# EAGLE board barbi_pozoriste_master_revb (EAGLE 5.00), part 1 of 2
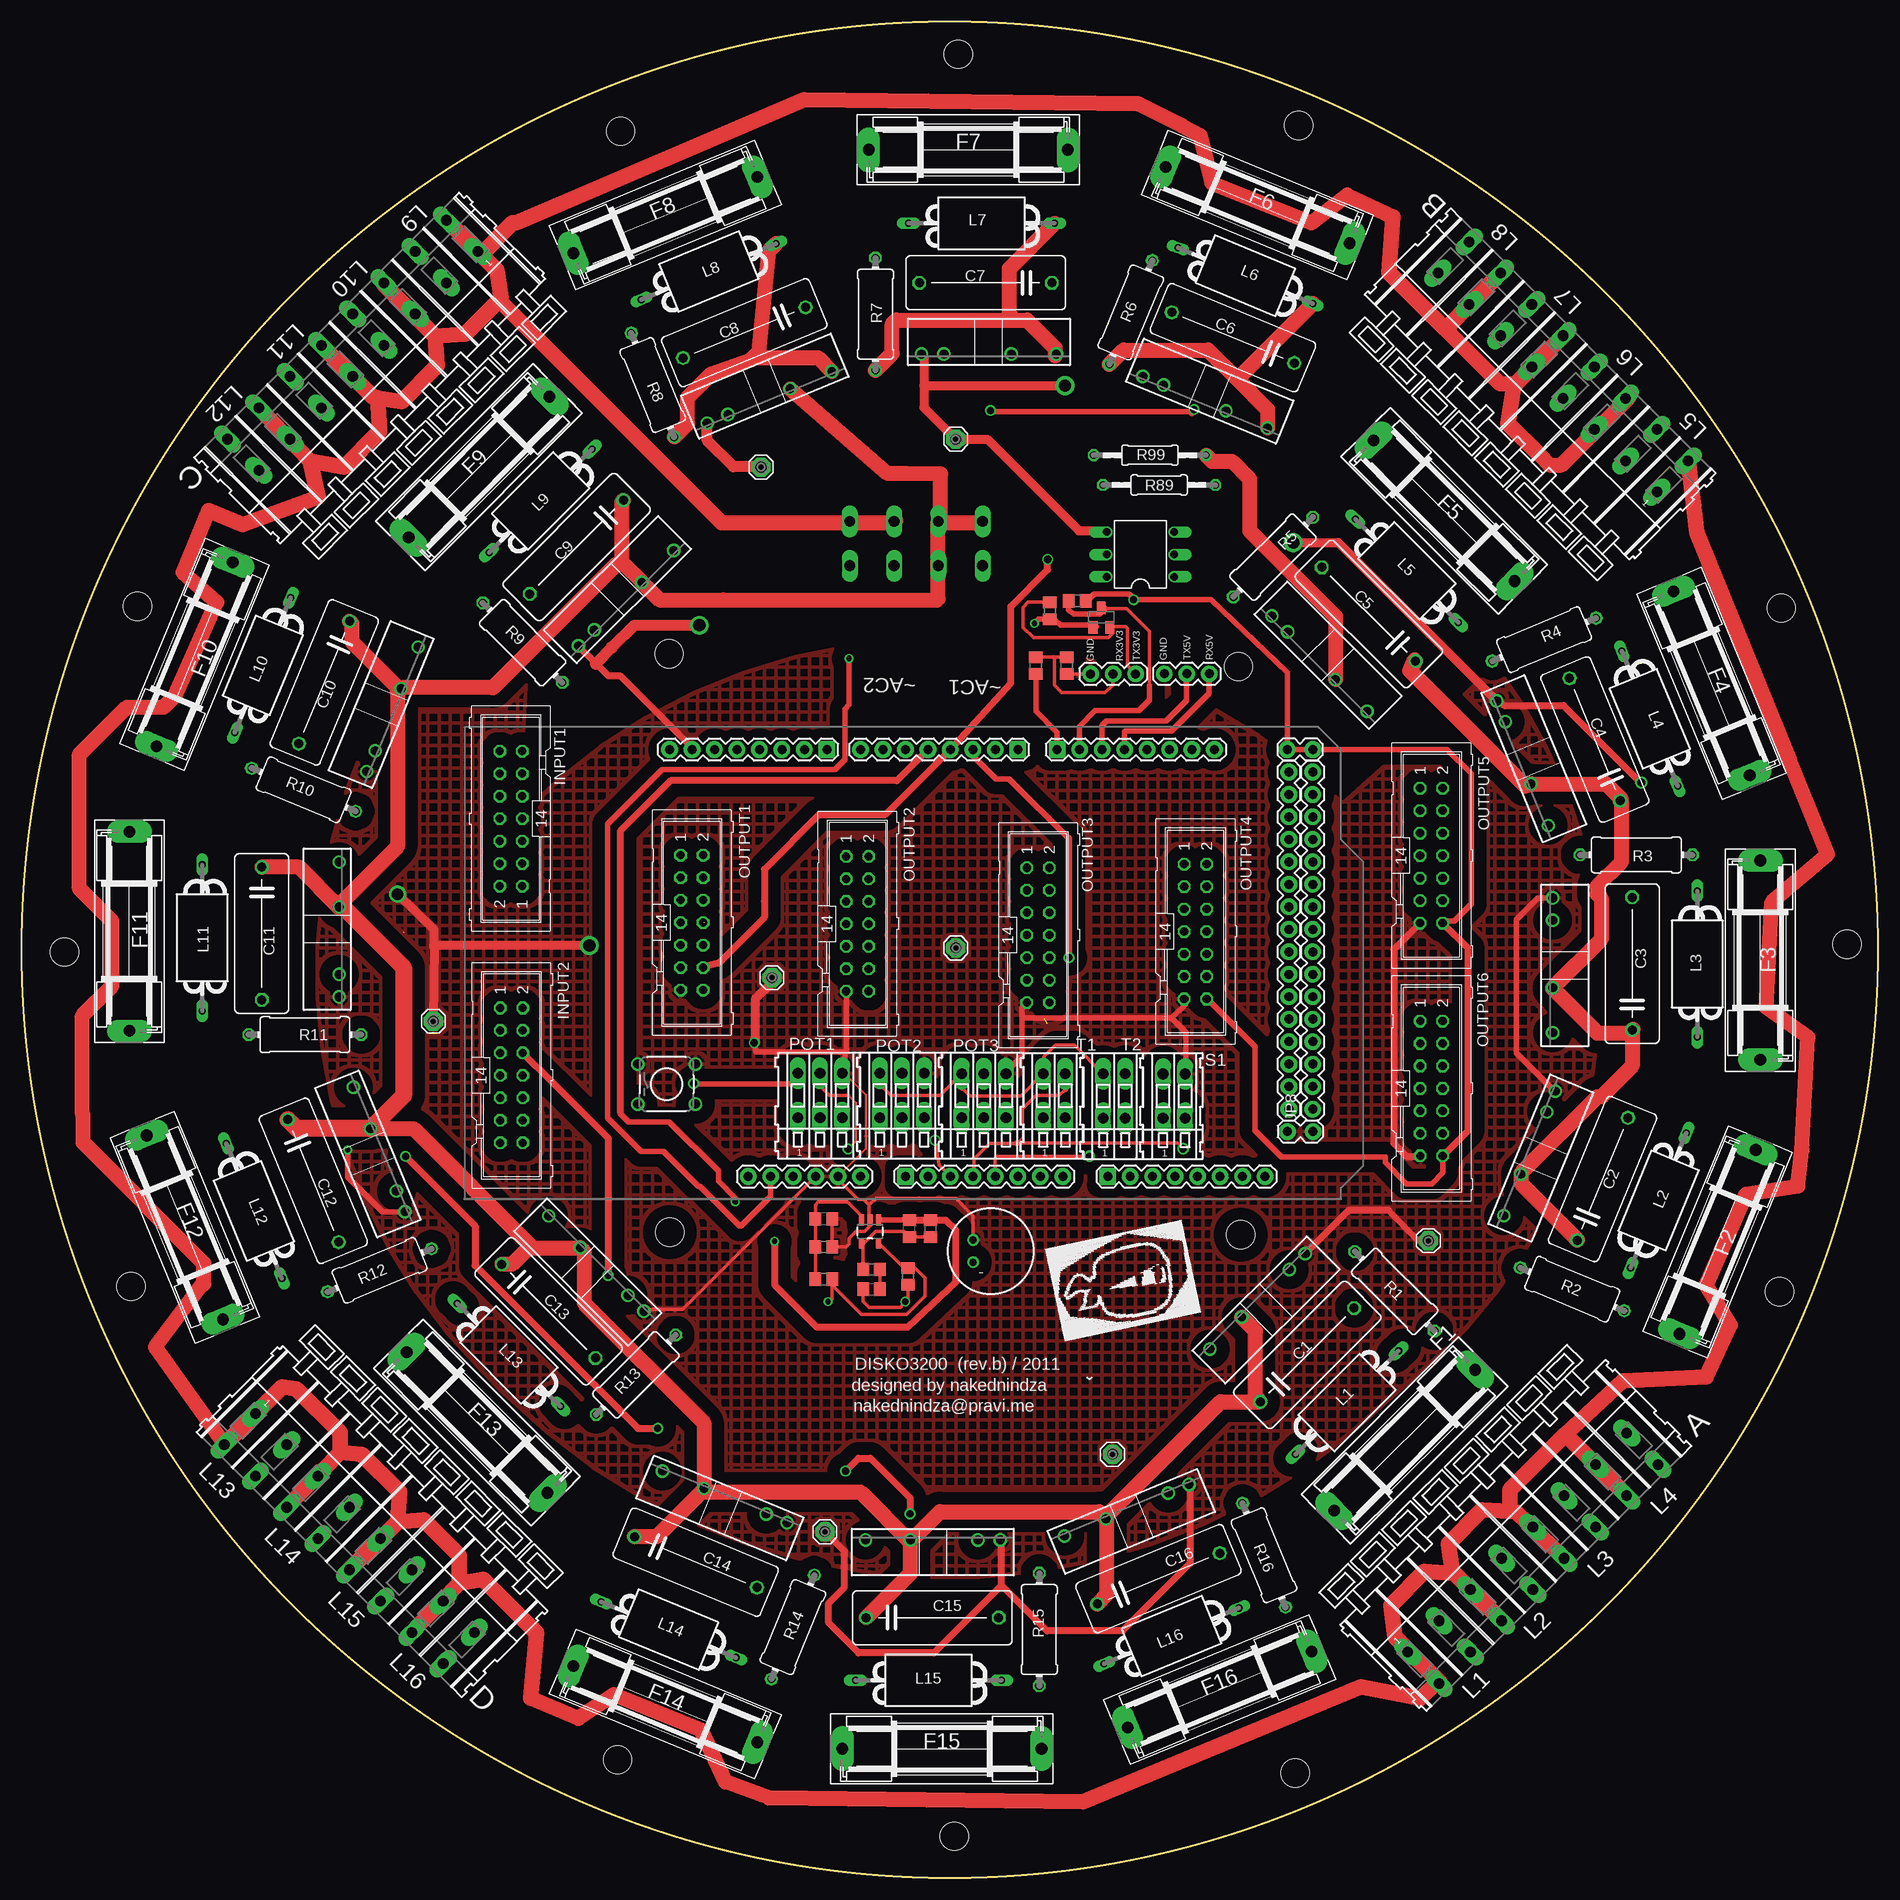
[diagram p0: board, top side]
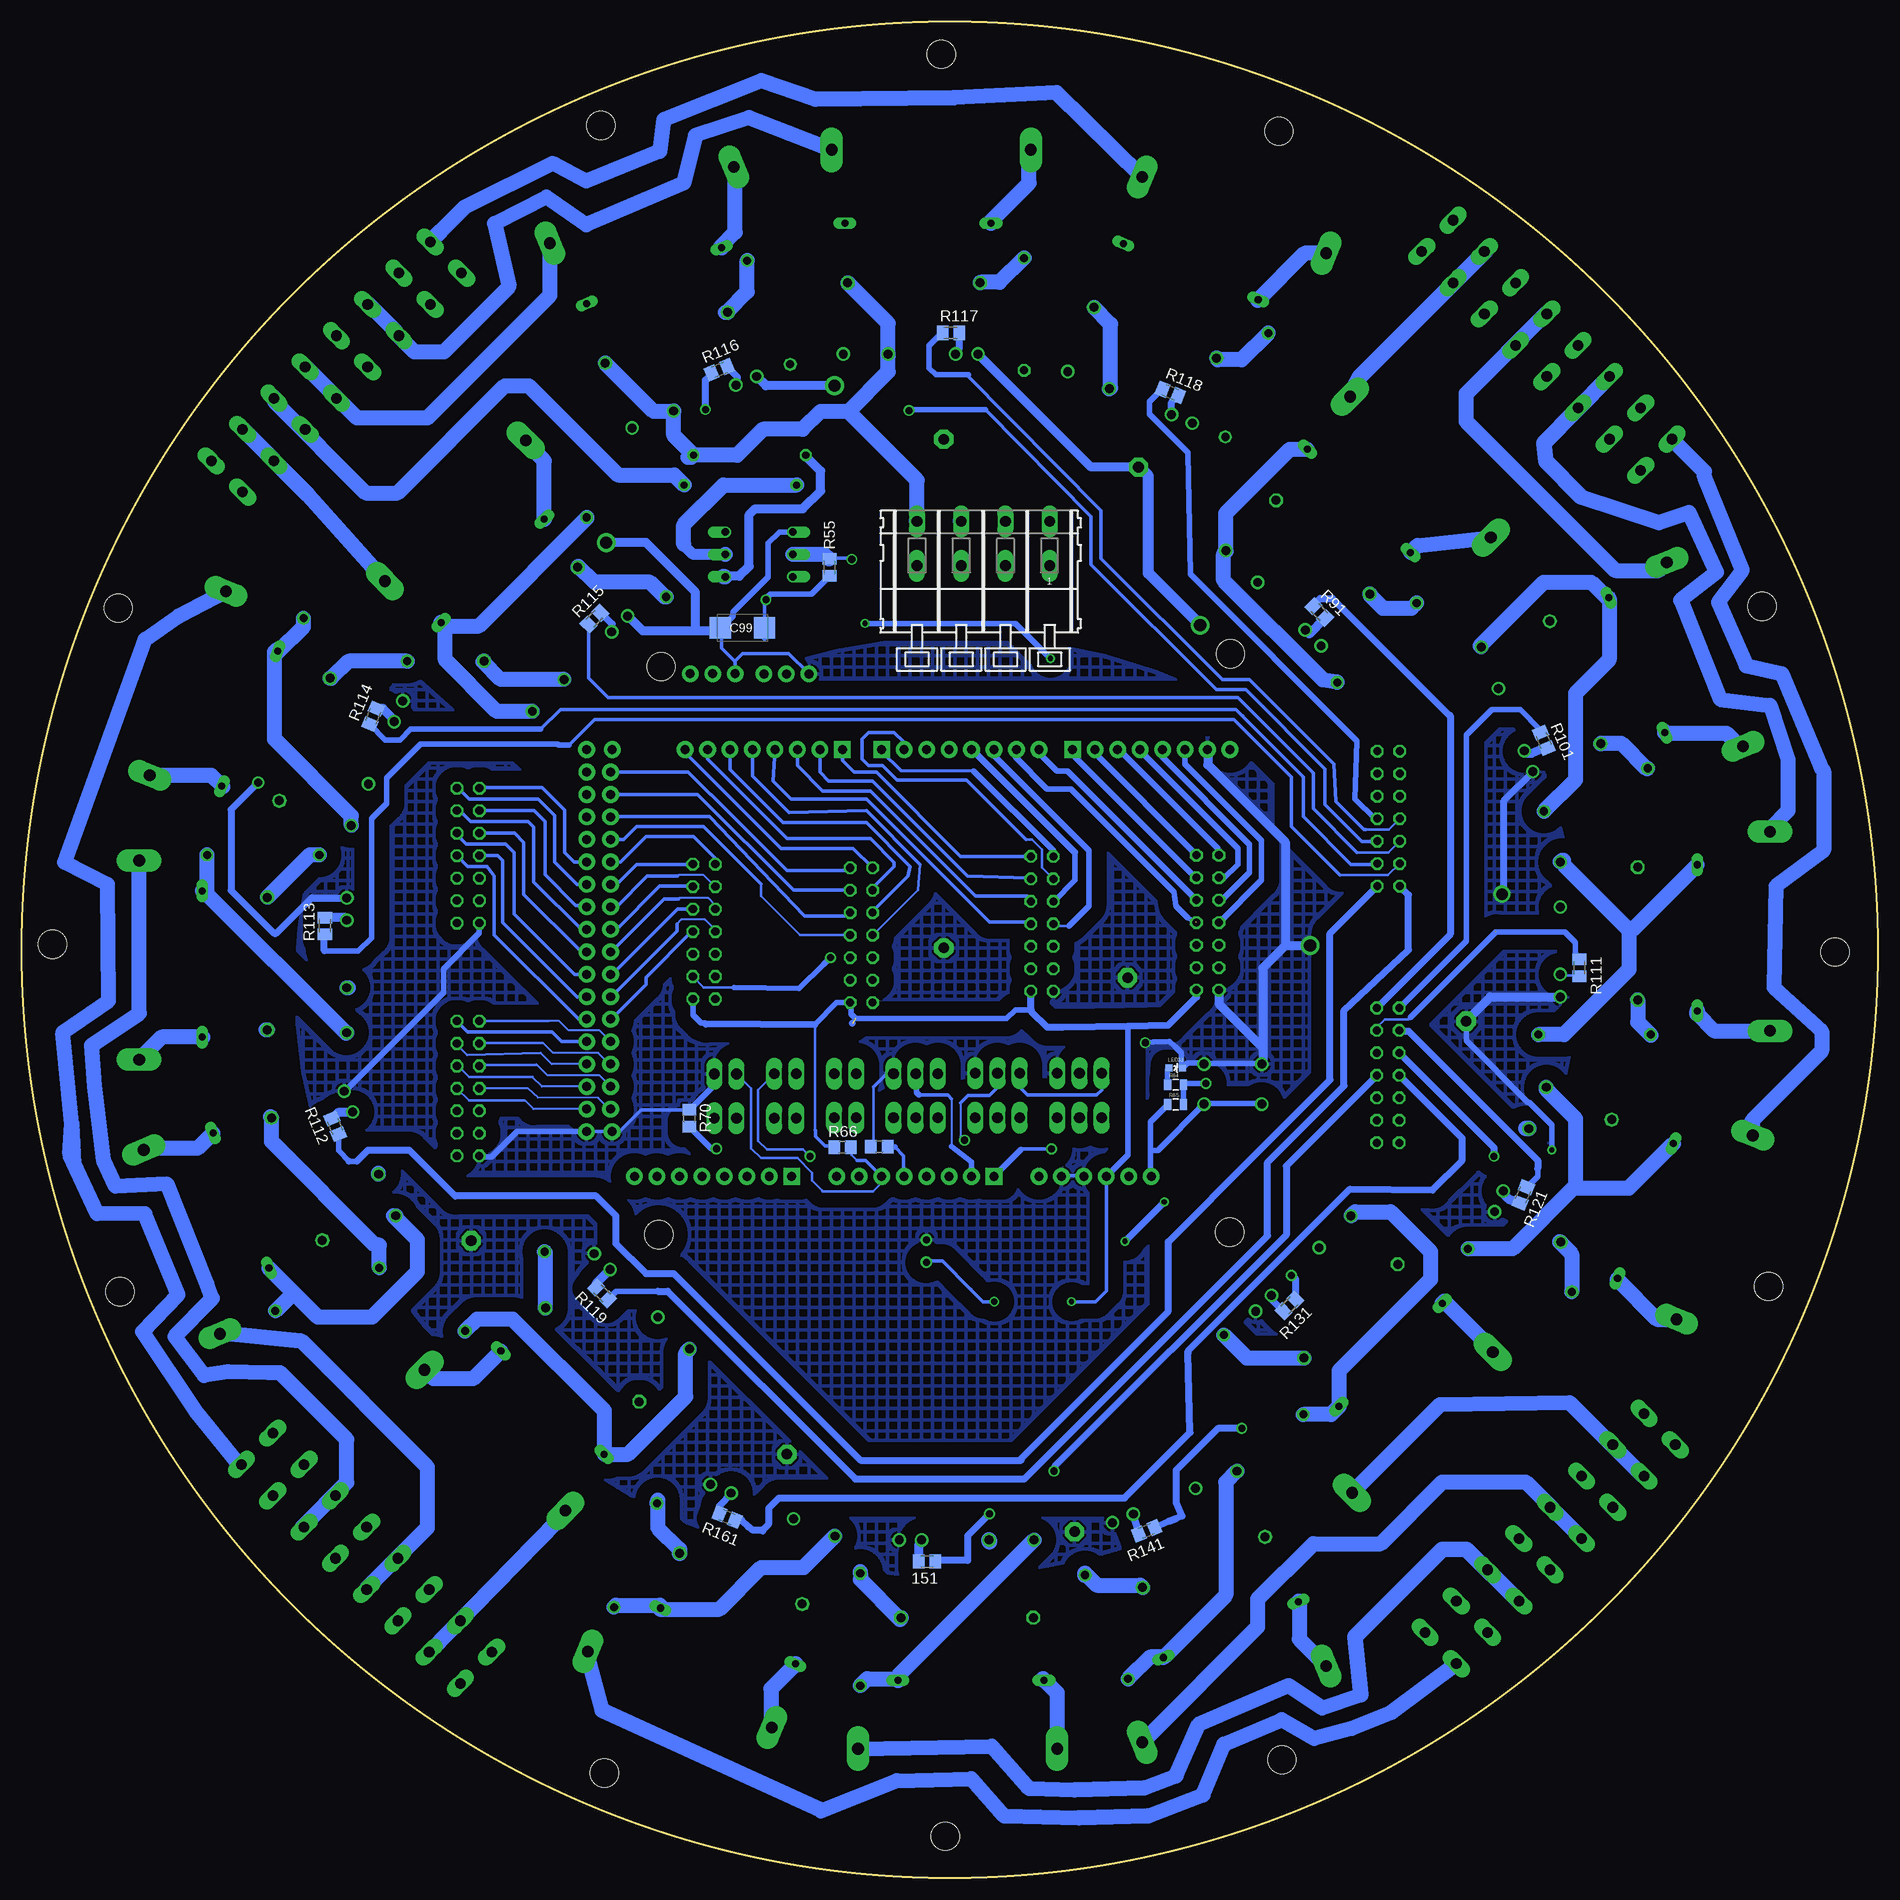
[diagram p1: board, bottom side, seen from below]

No outline drawn. Coordinates in mm, seen from the top.
Copper layers (1*16): Top 0.035mm / dielectric 1.5mm / Bottom 0.035mm
Design rules "default *": minimum track width 10mil, minimum drill 24mil, track to track 0.15mm, track to pad 0.15mm, pad to pad 0.15mm, via to via 0.15mm, smd to smd 0.15mm, copper to edge 40mil, drill to drill 8mil, minimum pad ring 10mil, minimum via ring 8mil, stop-mask expansion 4mil, vias tented up to drill 0mil, thermal gap 10mil
Holes 3.2 mm at -32.4,33.23 32.21,-32.42 -32.33,-32.15 31.94,31.79 -37.88,92.31 38.37,-93.28 -93.23,-38.28 -38.24,-91.8 38.76,92.95 93.31,38.39 -92.5,38.6 93.12,-38.88 0.27,101 -100.74,-0.47 -0.17,-100.44 100.73,0.41
Milling: area -105.5,-105.1 to 104.2,104.6

## Footprints (pad centres in the part's own frame; a part is rotated, then mirrored left to right if it is on the bottom)
M0805 = smd 1.3 x 1.6: 1 -0.95,0; 2 0.95,0
C150-064X183 = drill 1.016 octagon: 1 -7.493,0; 2 7.493,0
C0805 = smd 1.3 x 1.5: 1 -0.95,0; 2 0.95,0
SMC_C = smd 2.4 x 2.4: + -2.5,0; - 2.5,0
SH22,5 = drill 1.321 pad 2.54 long: 1 -11.252,0; 2 11.252,0
1X03 = drill 1.016 pad 1.88 round: 1 0,0; 2 2.54,0; 3 5.08,0
1X08 = drill 1.016 pad 1.88 square: 1 0,0 | drill 1.016 pad 1.88 round: 2 2.54,0; 3 5.08,0; 4 7.62,0; 5 10.16,0; 6 12.7,0; 7 15.24,0; 8 17.78,0
1X16 = drill 1.016 pad 1.88 round: 1 0,0; 2 2.54,0; 3 5.08,0; 4 7.62,0; 5 10.16,0; 6 12.7,0; 7 15.24,0; 8 17.78,0; 9 20.32,0; 10 22.86,0; 11 25.4,0; 12 27.94,0; 13 30.48,0; 14 33.02,0; 15 35.56,0; 16 38.1,0
1X06 = drill 1.016 pad 1.88 round: 1 0,0; 2 2.54,0; 3 5.08,0; 4 7.62,0; 5 10.16,0; 6 12.7,0
1X02_LOCK = drill 1.016 pad 1.88 round: 1 -0.178,0; 2 2.718,0
S102S01 = drill 1 round: 1 -7.62,0; 2 -2.54,0; 3 5.08,0; 4 7.62,0
ZD6-2W5 = drill 0.8 long: 1 -8.255,0; 2 8.255,0
LED-0603 = smd 0.8 x 0.8: A 0,-0.75; C 0,0.75
MCS08 = drill 1.194 pad 2.159 octagon: MP 0,0
DIL06 = drill 0.813 offset: 1 -2.54,-3.81; 2 0,-3.81; 3 2.54,-3.81; 4 2.54,3.81; 5 0,3.81; 6 -2.54,3.81
SOT23 = smd 1 x 1.4: 1 -0.95,-1.1; 2 0.95,-1.1; 3 0,1.1
0411/12 = drill 0.914 octagon: 1 -6.35,0; 2 6.35,0
R0805 = smd 1.3 x 1.5: 1 -0.95,0; 2 0.95,0
0805 = smd 0.8 x 1.2: 1 -0.9,0; 2 0.9,0
0207/12 = drill 0.813 octagon: 1 -6.35,0; 2 6.35,0
TACTILE-PTH = drill 1.016 round: 1 -3.251,2.261; 2 3.251,2.261; 3 -3.251,-2.261; 4 3.251,-2.261
ML14 = drill 0.914 octagon: 1 -7.62,-1.27; 2 -7.62,1.27; 3 -5.08,-1.27; 4 -5.08,1.27; 5 -2.54,-1.27; 6 -2.54,1.27; 7 0,-1.27; 8 0,1.27; 9 2.54,-1.27; 10 2.54,1.27; 11 5.08,-1.27; 12 5.08,1.27; 13 7.62,-1.27; 14 7.62,1.27
MIC-9.7MM = drill 0.8 round: 1 -2,1.27; 2 -2,-1.27
SOT23-5 = smd 0.55 x 1.2: 1 -0.95,-1.3; 2 0,-1.3; 3 0.95,-1.3; 4 0.95,1.3; 5 -0.95,1.3
255-404-5 = drill 1.2 long: A1 -7.5,0; A2 -2.5,0; A3 2.5,0; A4 7.5,0; B1 -7.5,-5; B2 -2.5,-5; B3 2.5,-5; B4 7.5,-5
255-408-5 = drill 1.2 long: A1 -17.5,0; A2 -12.5,0; A3 -7.5,0; A4 -2.5,0; A5 2.5,0; A6 7.5,0; A7 12.5,0; A8 17.5,0; B1 -17.5,-5; B2 -12.5,-5; B3 -7.5,-5; B4 -2.5,-5; B5 2.5,-5; B6 7.5,-5; B7 12.5,-5; B8 17.5,-5
233-103 = drill 1.2 long: A1 -2.5,2.5; A2 0,2.5; A3 2.5,2.5; B1 -2.5,-2.5; B2 0,-2.5; B3 2.5,-2.5
233-102 = drill 1.2 long: A1 -1.25,2.5; A2 1.25,2.5; B1 -1.25,-2.5; B2 1.25,-2.5

## Placement (x,y rotation side)
151  330R  [M0805]  1.88,-69.37 180 bottom
C1  68nF  [C150-064X183]  39.73,-46.02 45 top
C2  68nF  [C150-064X183]  73.11,-26.14 67.5 top
C3  68nF  [C150-064X183]  76.46,-1.79 90 top
C4  68nF  [C150-064X183]  72.24,23.54 112.5 top
C5  68nF  [C150-064X183]  46.68,37.73 135 top
C6  68nF  [C150-064X183]  31.33,68.96 157.5 top
C7  68nF  [C150-064X183]  3.38,75.17 180 top
C8  68nF  [C150-064X183]  -23.91,69.53 202.5 top
C9  68nF  [C150-064X183]  -42.85,45.3 225 top
C10  68nF  [C150-064X183]  -71.38,30 247.5 top
C11  68nF  [C150-064X183]  -78.45,1.61 270 top
C12  68nF  [C150-064X183]  -72.62,-26.34 292.5 top
C13  68nF  [C150-064X183]  -46.03,-41.08 315 top
C14  68nF  [C150-064X183]  -29.4,-69.45 337.5 top
C15  68nF  [C150-064X183]  -2.64,-75.73 0 top
C16  68nF  [C150-064X183]  22.92,-71.3 22.5 top
C17  4.7uF  [C0805]  -9.52,-38.58 0 top
C18  12pF  [C0805]  -5.24,-31.75 90 top
C19  1uF  [C0805]  -14.92,-30.64 180 top
C99  47uF  [SMC_C]  22.74,36.17 180 bottom
F1  3A  [SH22,5]  50.73,-55.68 225 top
F2  3A  [SH22,5]  86.12,-33.24 247.5 top
F3  3A  [SH22,5]  90.94,-1.38 90 top
F4  3A  [SH22,5]  85.45,29.88 112.5 top
F5  3A  [SH22,5]  55.21,49.4 315 top
F6  3A  [SH22,5]  34.11,83.96 337.5 top
F7  3A  [SH22,5]  1.42,90.2 0 top
F8  3A  [SH22,5]  -32.84,82.81 22.5 top
F9  3A  [SH22,5]  -53.89,54.33 45 top
F10  3A  [SH22,5]  -86.03,33.17 67.5 top
F11  3A  [SH22,5]  -93.42,1.87 90 top
F12  3A  [SH22,5]  -87.15,-31.6 112.5 top
F13  3A  [SH22,5]  -54.11,-53.65 315 top
F14  3A  [SH22,5]  -32.83,-85.5 337.5 top
F15  3A  [SH22,5]  -1.57,-90.53 0 top
F16  3A  [SH22,5]  29.84,-83.84 22.5 top
JP1  [1X03]  23.57,30.97 0 top
JP2  [1X03]  15.24,30.96 0 top
JP3  [1X08]  -14.57,22.41 180 top
JP4  [1X08]  7.02,22.41 180 top
JP5  [1X08]  11.46,22.41 0 top
JP6  [1X08]  17.18,-25.85 0 top
JP7  [1X08]  -5.68,-25.85 0 top
JP8  M16PTH  [1X16]  40.36,-18.23 90 top
JP9  M16PTH  [1X16]  37.66,-18.23 90 top
JP10  [1X06]  -23.46,-25.85 0 top
JP11  [1X02_LOCK]  37.67,-20.77 0 top
JP12  [1X02_LOCK]  37.65,22.41 0 top
K1  S202S01  [S102S01]  34.12,-39.96 45 top
K2  S202S01  [S102S01]  64.87,-23.25 67.5 top
K3  S202S01  [S102S01]  67.48,-1.98 90 top
K4  S202S01  [S102S01]  64.06,20.87 112.5 top
K5  S202S01  [S102S01]  41.12,32.11 135 top
K6  S202S01  [S102S01]  28.19,61.66 157.5 top
K7  S202S01  [S102S01]  3.74,67.11 180 top
K8  S202S01  [S102S01]  -21.06,62.22 202.5 top
K9  S202S01  [S102S01]  -37.27,39.52 225 top
K10  S202S01  [S102S01]  -63.68,26.96 247.5 top
K11  S202S01  [S102S01]  -69.69,2.08 270 top
K12  S202S01  [S102S01]  -65.18,-22.79 292.5 top
K13  S202S01  [S102S01]  -40.64,-35.69 315 top
K14  S202S01  [S102S01]  -26.12,-62.07 337.5 top
K15  S202S01  [S102S01]  -2.58,-66.94 0 top
K16  S202S01  [S102S01]  19.33,-63.58 22.5 top
L1  300uH  [ZD6-2W5]  44.22,-51.41 45 top
L2  300uH  [ZD6-2W5]  79.44,-28.56 67.5 top
L3  300uH  [ZD6-2W5]  83.81,-1.83 270 top
L4  300uH  [ZD6-2W5]  78.45,25.89 292.5 top
L5  300uH  [ZD6-2W5]  50.99,42.6 135 top
L6  300uH  [ZD6-2W5]  32.73,75.97 157.5 top
L7  300uH  [ZD6-2W5]  2.91,81.89 180 top
L8  300uH  [ZD6-2W5]  -27.92,76.44 202.5 top
L9  300uH  [ZD6-2W5]  -46.93,50.52 225 top
L10  300uH  [ZD6-2W5]  -78.33,31.94 247.5 top
L11  300uH  [ZD6-2W5]  -85.17,1.12 270 top
L12  300uH  [ZD6-2W5]  -79.33,-29.75 292.5 top
L13  300uH  [ZD6-2W5]  -50.52,-46.02 135 top
L14  300uH  [ZD6-2W5]  -32.45,-77.07 157.5 top
L15  300uH  [ZD6-2W5]  -3.07,-82.8 180 top
L16  300uH  [ZD6-2W5]  24.39,-77.79 202.5 top
LED33  Red  [LED-0603]  -26.21,-13.58 270 bottom
LSP1  MCS08  [MCS08]  -20.79,-3.38 315 top
LSP2  MCS08  [MCS08]  -14.8,-66 315 top
LSP3  MCS08  [MCS08]  53.43,-33.11 315 top
LSP4  MCS08  [MCS08]  0,-0.01 315 top
LSP5  MCS08  [MCS08]  -0.01,57.48 315 top
LSP6  MCS08  [MCS08]  -22.01,54.33 315 top
LSP7  MCS08  [MCS08]  -59.05,-8.3 315 top
LSP8  MCS08  [MCS08]  17.73,-57.25 315 top
OK1  H11A1M  [DIL06]  20.87,44.47 90 top
Q1  BSS123  [SOT23]  16.45,37.34 0 top
R1  120R 2W  [0411/12]  49.61,-38.84 135 top
R2  120R 2W  [0411/12]  69.68,-38.6 337.5 top
R3  120R 2W  [0411/12]  76.92,10.5 0 top
R4  120R 2W  [0411/12]  66.5,34.84 22.5 top
R5  120R 2W  [0411/12]  35.86,44.16 45 top
R6  120R 2W  [0411/12]  19.79,71.82 247.5 top
R7  120R 2W  [0411/12]  -9.08,71.62 270 top
R8  120R 2W  [0411/12]  -34.25,63.61 292.5 top
R9  120R 2W  [0411/12]  -48.96,34.49 135 top
R10  120R 2W  [0411/12]  -73.71,17.86 337.5 top
R11  120R 2W  [0411/12]  -73.57,-9.82 0 top
R12  120R 2W  [0411/12]  -65.13,-36.46 22.5 top
R13  120R 2W  [0411/12]  -36.15,-48.27 225 top
R14  120R 2W  [0411/12]  -18.41,-76.78 247.5 top
R15  120R 2W  [0411/12]  9.44,-77.06 270 top
R16  120R 2W  [0411/12]  34.84,-68.66 292.5 top
R17  2k2  [R0805]  -5.4,-37.15 90 top
R18  10k  [R0805]  9.05,31.91 90 top
R19  10k  [R0805]  12.54,31.91 270 top
R20  10k  [R0805]  -9.53,-36.35 0 top
R21  10k  [R0805]  -14.92,-37.46 0 top
R22  10k  [R0805]  -14.92,-33.81 180 top
R23  1M  [R0805]  -2.86,-31.75 270 top
R24  10k  [R0805]  10.64,38.1 90 top
R25  10k  [R0805]  13.72,39.21 180 top
R55  10k  [M0805]  12.92,43.01 270 bottom
R64  330  [0805]  -26.21,-15.49 0 bottom
R65  10k  [0805]  -26.21,-17.71 0 bottom
R66  1k  [R0805]  11.44,-22.53 0 bottom
R70  10k  [R0805]  28.76,-19.28 270 bottom
R71  10k  [R0805]  7.28,-22.49 0 bottom
R89  47k 1W  [0207/12]  22.99,52.31 0 top
R91  330R  [M0805]  -42.44,37.94 315 bottom
R99  47k 1W  [0207/12]  21.94,55.68 0 top
R101  330R  [M0805]  -67.82,23.44 292.5 bottom
R111  330R  [M0805]  -71.85,-2.24 270 bottom
R112  330R  [M0805]  68.78,-20.18 112.5 bottom
R113  330R  [M0805]  69.95,2.47 90 bottom
R114  330R  [M0805]  64.5,26.17 67.5 bottom
R115  330R  [M0805]  39.49,37.19 45 bottom
R116  330R  [M0805]  25.36,65.33 22.5 bottom
R117  330R  [M0805]  -0.81,69.51 0 bottom
R118  330R  [M0805]  -25.61,62.78 337.5 bottom
R119  330R  [M0805]  38.61,-39.06 135 bottom
R121  330R  [M0805]  -65.49,-27.94 247.5 bottom
R131  330R  [M0805]  -39.07,-40.41 225 bottom
R141  330R  [M0805]  -22.92,-65.92 202.5 bottom
R161  330R  [M0805]  24.48,-64.35 157.5 bottom
S1  [TACTILE-PTH]  -32.69,-15.41 0 top
SV1  [ML14]  -50.28,14.6 90 top
SV2  [ML14]  -29.83,2.84 270 top
SV3  [ML14]  -11.11,2.7 270 top
SV4  [ML14]  9.32,1.43 270 top
SV5  [ML14]  27.09,1.83 270 top
SV6  [ML14]  53.77,-15.9 270 top
SV7  [ML14]  53.76,10.41 270 top
SV8  [ML14]  -50.22,-14.42 270 top
U$1  MIC9.7MM  [MIC-9.7MM]  3.97,-34.29 0 top
U$2  OPA344  [SOT23-5]  -9.68,-32.07 180 top
X1  WAGO4-255-404-5  [255-404-5]  -4.48,43.19 180 bottom
X2  WAGO8-255-408-5  [255-408-5]  -66.4,66.33 225 top
X3  WAGO8-255-408-5  [255-408-5]  -66.78,-65.01 315 top
X5  WAGO8-255-408-5  [255-408-5]  63.47,-67.24 45 top
X6  WAGO8-255-408-5  [255-408-5]  66.88,63.89 135 top
X10  [233-103]  -15.35,-16.69 0 top
X11  [233-103]  3.17,-16.72 0 top
X12  [233-103]  -6.08,-16.7 0 top
X13  [233-102]  11.14,-16.72 0 top
X14  [233-102]  17.91,-16.75 0 top
X15  [233-102]  24.67,-16.76 0 top

## Library data of the parts
151 C1-C19 C99 R1-R25 R55 R66 R70 R71 R89 R91 R99 R101 R111-R119 R121 R131 R141 R161 = rcl
F1-F16 = fuse
JP1-JP12 LED33 R64 R65 S1 U$1 U$2 = SparkFun
K1-K16 = relay
L1-L16 = inductor-neosid
LSP1-LSP8 = solpad
OK1 = optocoupler
Q1 = transistor-small-signal
SV1-SV8 = con-ml
X1-X3 X5 X6 X10-X15 = con-wago

## Nets
3.3: JP10.2 Q1.1 R24.1
5V: R64.2 R65.2 X10.A1 X11.A1 X12.A1 X13.A1 X14.A1
A0: JP7.1 X10.A2
A1: JP7.2 X11.A2
A2: JP7.3 X12.A2
A3: JP7.4 R70.2 X13.A2
A4: JP7.5 R71.2 X14.A2
A5: JP7.6 R66.2 X15.A1
A6: JP7.7
A7: JP7.8
A8: JP6.1
A9: JP6.2
A10: JP6.3
A11: JP6.4
A12: JP6.5
A13: JP6.6
A14: JP6.7
A15: JP6.8
AC_NEUTRAL: R89.2 X1.B1 X1.B2 X2.B1 X2.B3 X2.B5 X2.B7 X3.B1 X3.B3 X3.B5 X3.B7 X5.B1 X5.B3 X5.B5 X5.B7 X6.B1 X6.B3 X6.B5 X6.B7
AC_PHASE: C1.1 C2.1 C3.1 C4.1 C5.1 C6.1 C7.1 C8.1 C9.1 C10.1 C11.1 C12.1 C13.1 C14.1 C15.1 C16.1 K1.2 K2.2 K3.2 K4.2 K5.2 K6.2 K7.2 K8.2 K9.2 K10.2 K11.2 K12.2 K13.2 K14.2 K15.2 K16.2 R99.2 X1.B3 X1.B4
AREF: JP3.8
D2: JP4.3 SV5.12
D3: JP4.4 OK1.5 R55.1 SV2.12
D4: C18.2 JP4.5 R23.1 SV3.5 U$2.1
D5: JP4.6 SV3.7
D6: JP4.7 SV2.8
D7: JP4.8 SV2.6
D8: JP3.1 SV2.4
D9: JP3.2 SV2.2
D10: JP3.3 SV2.1
D11: JP3.4 SV2.3
D12: JP3.5 SV2.5
D13: JP3.6 SV2.7
D14: JP5.1 R18.1 SV3.2
D15: JP5.2 Q1.3 R25.2 SV3.4
D16: JP1.2 JP5.3 SV3.6
D17: JP1.3 JP5.4 SV3.8
D18: JP5.5 SV4.7
D19: JP5.6 SV4.5
D22: JP9.16 SV4.2
D23: JP8.16
D24: JP9.15 SV4.4
D25: JP8.15
D26: JP9.14 SV4.6
D27: JP8.14
D28: JP9.13 SV4.8
D29: JP8.13
D30: JP9.12 SV5.1
D31: JP8.12 SV7.1
D32: JP9.11 SV5.2
D33: JP8.11 SV7.2
D34: JP9.10 SV5.3
D35: JP8.10 SV7.3
D36: JP9.9 SV5.4
D37: JP8.9 SV7.4
D38: JP9.8 SV5.5
D39: JP8.8 SV7.5
D40: JP9.7 SV5.6
D41: JP8.7 SV7.6
D42: JP9.6 SV5.7
D43: JP8.6 SV7.7
D44: JP9.5 SV5.8
D45: JP8.5 SV7.8
D46: JP9.4 SV6.1
D47: JP8.4 SV6.2
D48: JP9.3 SV6.3
D49: JP8.3 SV6.4
D50: JP9.2 SV6.5
D51: JP8.2 SV6.6
D52: JP9.1 SV6.7
D53: JP8.1 SV6.8
GND: C19.1 C99.- JP1.1 JP2.1 JP3.7 JP10.4 JP10.5 JP11.1 JP11.2 K1.4 K2.4 K3.4 K4.4 K5.4 K6.4 K7.4 K8.4 K9.4 K10.4 K11.4 K12.4 K13.4 K14.4 K15.4 K16.4 LED33.C LSP1.MP LSP2.MP LSP3.MP LSP4.MP LSP5.MP LSP6.MP LSP7.MP LSP8.MP OK1.4 R19.2 R22.1 R70.1 R71.1 S1.1 S1.2 SV2.13 SV3.13 SV4.13 SV5.13 SV6.13 SV7.13 U$1.1 U$2.2 X10.A3 X11.A3 X12.A3 X15.A2
INPUT1: R119.1 SV1.2
INPUT2: R112.1 SV1.1
INPUT3: R113.1 SV1.4
INPUT4: R114.1 SV1.3
INPUT5: R115.1 SV1.6
INPUT6: R116.1 SV1.5
INPUT7: R117.1 SV1.8
INPUT8: R118.1 SV1.7
INPUT9: R91.1 SV8.2
INPUT10: R101.1 SV8.1
INPUT11: R111.1 SV8.4
INPUT12: R121.1 SV8.3
INPUT13: R131.1 SV8.6
INPUT14: R141.1 SV8.5
INPUT15: 151.1 SV8.8
INPUT16: R161.1 SV8.7
LAMP1: F1.1 L1.2
LAMP2: F2.1 L2.2
LAMP3: F3.1 L3.2
LAMP4: F4.1 L4.2
LAMP5: F5.1 L5.2
LAMP6: F6.1 L6.2
LAMP7: F7.1 L7.2
LAMP8: F8.1 L8.2
LAMP9: F9.1 L9.2
LAMP10: F10.1 L10.2
LAMP11: F11.1 L11.2
LAMP12: F12.1 L12.2
LAMP13: F13.1 L13.2
LAMP14: F14.1 L14.2
LAMP15: F15.1 L15.2
LAMP16: F16.1 L16.2
N$1: K2.1 L2.1 R2.2
N$2: K1.1 L1.1 R1.1
N$3: C1.2 R1.2
N$4: C2.2 R2.1
N$5: F4.2 X5.B8
N$6: K3.1 L3.1 R3.2
N$7: OK1.1 R99.1
N$8: C3.2 R3.1
N$9: F1.2 X5.B2
N$10: F2.2 X5.B4
N$11: C4.2 R4.1
N$12: K4.1 L4.1 R4.2
N$13: K5.1 L5.1 R5.2
N$14: OK1.2 R89.1
N$15: C5.2 R5.1
N$16: F3.2 X5.B6
N$17: K6.1 L6.1 R6.2
N$18: C6.2 R6.1
N$19: F5.2 X6.B2
N$20: F8.2 X6.B8
N$21: C7.2 R7.1
N$22: K7.1 L7.1 R7.2
N$23: K8.1 L8.1 R8.2
N$24: C8.2 R8.1
N$25: F7.2 X6.B6
N$26: F6.2 X6.B4
N$27: K2.3 R112.2
N$28: K3.3 R113.2
N$29: K4.3 R114.2
N$30: K5.3 R115.2
N$31: K6.3 R116.2
N$32: K7.3 R117.2
N$33: K8.3 R118.2
N$34: K1.3 R119.2
N$36: K10.3 R101.2
N$38: K11.3 R111.2
N$40: K12.3 R121.2
N$42: K13.3 R131.2
N$44: K14.3 R141.2
N$46: 151.2 K15.3
N$48: K16.3 R161.2
N$50: K9.3 R91.2
N$59: K9.1 L9.1 R9.1
N$60: C9.2 R9.2
N$61: K10.1 L10.1 R10.2
N$62: C10.2 R10.1
N$63: K11.1 L11.1 R11.2
N$64: C11.2 R11.1
N$65: C12.2 R12.1
N$66: K12.1 L12.1 R12.2
N$67: K13.1 L13.1 R13.2
N$68: C13.2 R13.1
N$69: K14.1 L14.1 R14.2
N$70: C14.2 R14.1
N$71: C15.2 R15.1
N$72: K15.1 L15.1 R15.2
N$73: K16.1 L16.1 R16.2
N$74: C16.2 R16.1
N$75: C17.1 R17.1 U$1.2
N$79: C19.2 R21.1 R22.2 U$2.3
N$80: C17.2 R20.2
N$81: C18.1 R20.1 R23.2 U$2.4
N$139: F12.2 X2.B8
N$140: F9.2 X2.B2
N$141: F10.2 X2.B4
N$142: F11.2 X2.B6
N$143: F13.2 X3.B2
N$144: F16.2 X3.B8
N$145: F15.2 X3.B6
N$146: F14.2 X3.B4
N$163: LED33.A R64.1
RES: JP10.1 R65.1 S1.3 S1.4
RX0: JP4.1 SV3.1
RX3V3: JP2.2 R18.2 R19.1
SCL: JP5.8 SV4.1
SDA: JP5.7 SV4.3
TX1: JP4.2 SV3.3
TX3V3: JP2.3 Q1.2 R24.2
VCC: C99.+ JP10.3 JP12.1 JP12.2 R17.2 R21.2 R25.1 R55.2 R66.1 SV2.14 SV3.14 SV4.14 SV5.14 SV6.14 SV7.14 U$2.5
VIN: JP10.6